# EAGLE board Dual Motor Driver (EAGLE 6.4)
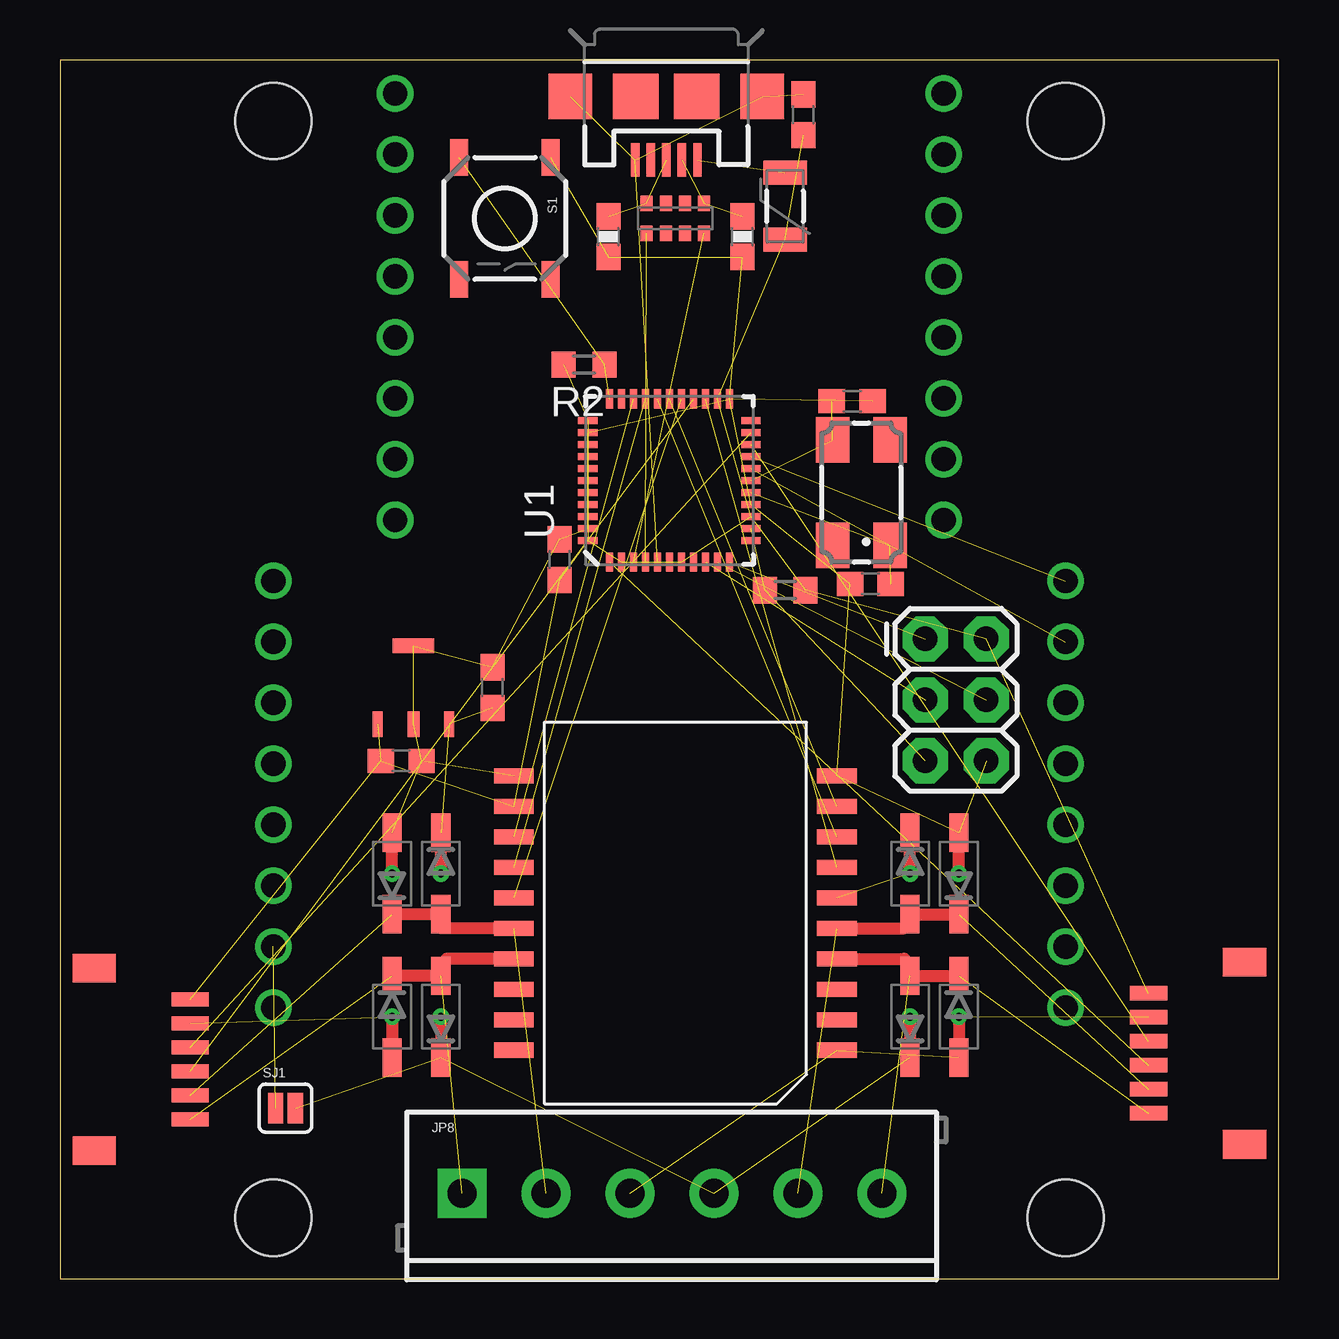
[diagram p0: board, top side]
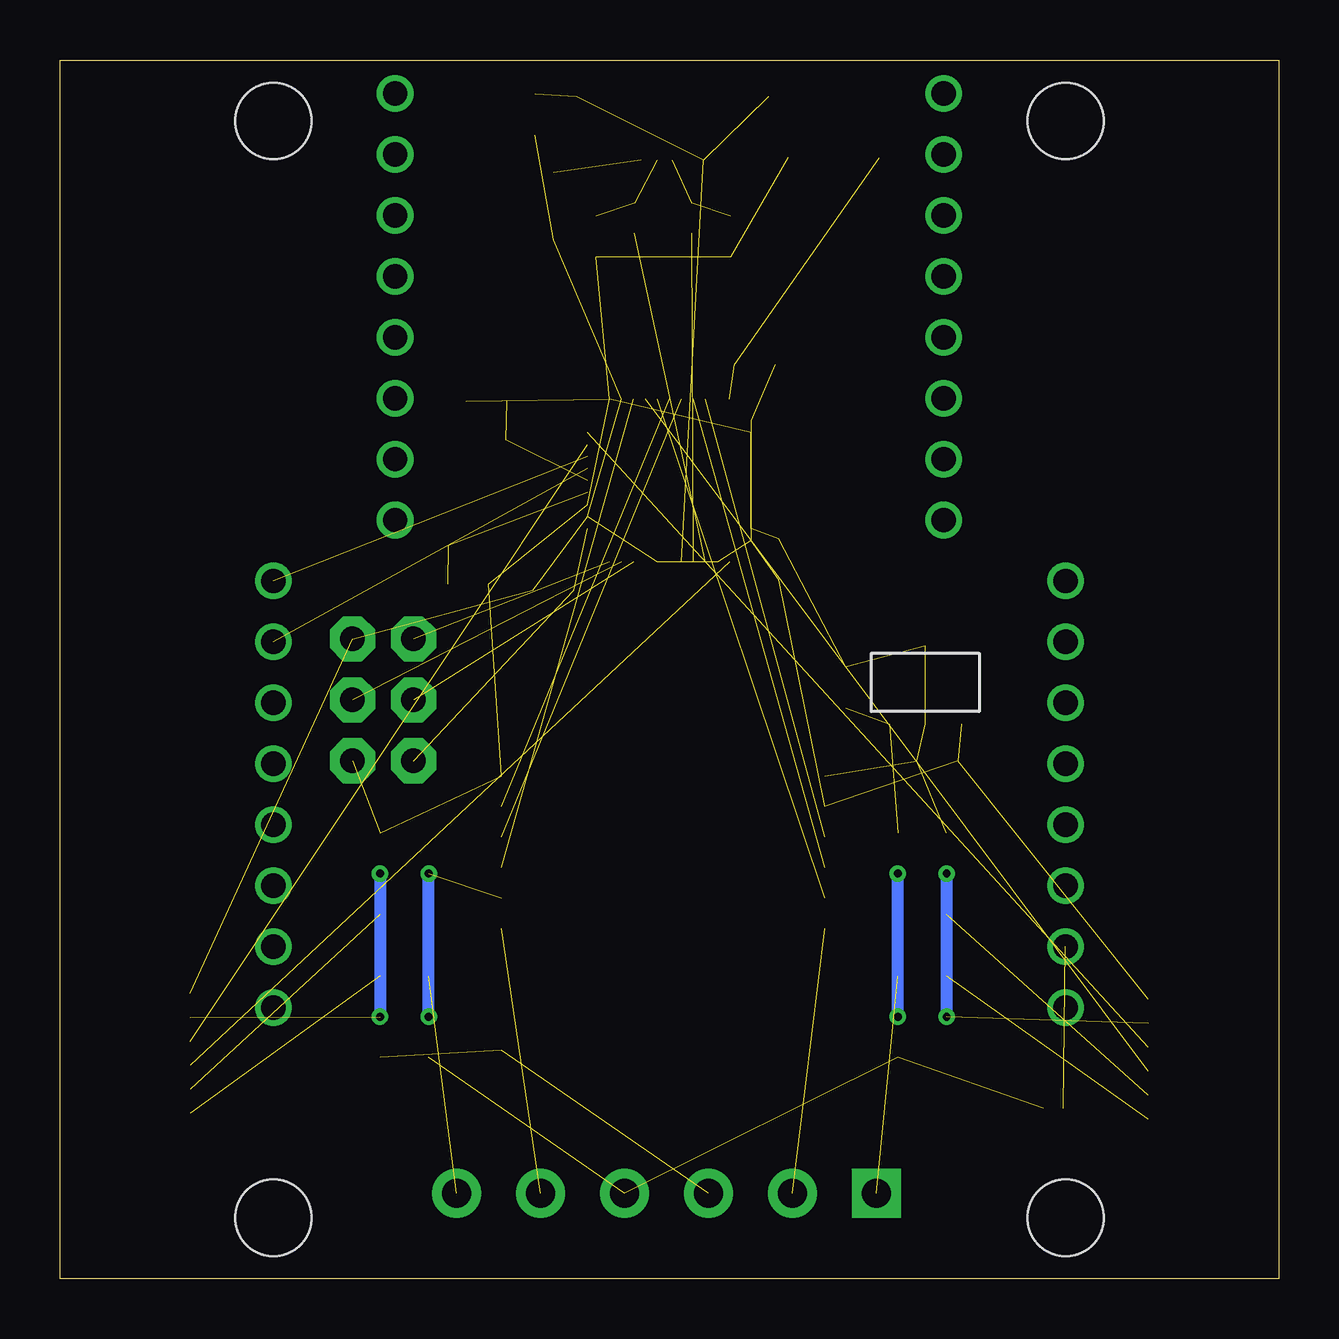
[diagram p1: board, bottom side, seen from below]

Size 50.8 x 50.8 mm. Coordinates in mm from the lower left corner, seen from the top.
Outline: 0,0 50.8,0 50.8,50.8 0,50.8 0,0
Copper layers (1*16): Top 0.0356mm / dielectric 1.5011mm / Bottom 0.0356mm
Design rules "OSHparkRules": minimum track width 6mil, minimum drill 13mil, track to track 6mil, track to pad 6mil, pad to pad 6mil, via to via 6mil, smd to smd 6mil, copper to edge 15mil, drill to drill 6mil, minimum pad ring 7mil, minimum via ring 7mil, stop-mask expansion 4mil, vias tented up to drill 0mil, thermal gap 10mil
Holes 3.17 mm at 8.89,2.54 41.91,2.54 41.91,48.26 8.89,48.26

## Footprints (pad centres in the part's own frame; a part is rotated, then mirrored left to right if it is on the bottom)
C0603 = smd 1.1 x 1: 1 -0.85,0; 2 0.85,0
SOD123 = smd 1.6 x 0.8: 1 -1.7,0; 2 1.7,0
PTC-1206 = smd 1 x 1.8: 1 -1.4,0; 2 1.4,0
2X3 = drill 1.016 pad 1.88 octagon: 1 0,0; 2 0,2.54; 3 2.54,0; 4 2.54,2.54; 5 5.08,0; 6 5.08,2.54
1X08_NO_SS = drill 1.016: 1 -8.89,0; 2 -6.35,0; 3 -3.81,0; 4 -1.27,0; 5 1.27,0; 6 3.81,0; 7 6.35,0; 8 8.89,0
6PIN-SH_SERIES_RA = smd 0.6 x 1.55: P$1 -2.5,2.125; P$2 -1.5,2.125; P$3 -0.5,2.125; P$4 0.5,2.125; P$5 1.5,2.125; P$6 2.5,2.125 | smd 1.2 x 1.8: P$7 3.8,-1.875; P$8 -3.8,-1.875
USB-MICROB = smd 0.35 x 1.4: D+ 0,2.65; D- -0.65,2.65; GND 1.3,2.65; ID 0.65,2.65; VBUS -1.3,2.65 | smd 1.8 x 1.9: MT1 -4,0; MT2 4,0 | smd 1.9 x 1.9: P$1 -1.27,0; P$2 1.27,0
SCREWTERMINAL-3.5MM-6 = drill 1.2 pad 2.032 square: 1 0,0 | drill 1.2 pad 2.032: 2 3.5,0; 3 7,0; 4 10.5,0; 5 14,0; 6 17.5,0
CTS406 = smd 1.9 x 1.4: 1 -2.2,-1.2; 2 2.2,-1.2; 3 2.2,1.2; 4 -2.2,1.2
R0603 = smd 1 x 1.1: 1 -0.85,0; 2 0.85,0
0603-ARV = smd 0.5 x 0.65: 1 -1.2,-0.625; 2 -0.4,-0.625; 3 0.4,-0.625; 4 1.2,-0.625; 5 1.2,0.625; 6 0.4,0.625; 7 -0.4,0.625; 8 -1.2,0.625
TACTILE_SWITCH_SMD = smd 1.524 x 0.762: 1 -2.54,1.905; 2 2.54,1.905; 3 -2.54,-1.905; 4 2.54,-1.905
SJ_2S = smd 0.635 x 1.27: 1 -0.412,0; 2 0.412,0
SPARKFUN-DIGITALIC_QFN-44-NOPAD = smd 0.8 x 0.3: 1 -3.4,2.5; 2 -3.4,2; 3 -3.4,1.5; 4 -3.4,1; 5 -3.4,0.5; 6 -3.4,0; 7 -3.4,-0.5; 8 -3.4,-1; 9 -3.4,-1.5; 10 -3.4,-2; 11 -3.4,-2.5; 23 3.4,-2.5; 24 3.4,-2; 25 3.4,-1.5; 26 3.4,-1; 27 3.4,-0.5; 28 3.4,0; 29 3.4,0.5; 30 3.4,1; 31 3.4,1.5; 32 3.4,2; 33 3.4,2.5 | smd 0.3 x 0.8: 12 -2.5,-3.4; 13 -2,-3.4; 14 -1.5,-3.4; 15 -1,-3.4; 16 -0.5,-3.4; 17 0,-3.4; 18 0.5,-3.4; 19 1,-3.4; 20 1.5,-3.4; 21 2,-3.4; 22 2.5,-3.4; 34 2.5,3.4; 35 2,3.4; 36 1.5,3.4; 37 1,3.4; 38 0.5,3.4; 39 0,3.4; 40 -0.5,3.4; 41 -1,3.4; 42 -1.5,3.4; 43 -2,3.4; 44 -2.5,3.4
POWERSO20 = smd 1.651 x 0.635: 1 -6.731,5.715; 2 -6.731,4.445; 3 -6.731,3.175; 4 -6.731,1.905; 5 -6.731,0.635; 6 -6.731,-0.635; 7 -6.731,-1.905; 8 -6.731,-3.175; 9 -6.731,-4.445; 10 -6.731,-5.715; 11 6.731,-5.715; 12 6.731,-4.445; 13 6.731,-3.175; 14 6.731,-1.905; 15 6.731,-0.635; 16 6.731,0.635; 17 6.731,1.905; 18 6.731,3.175; 19 6.731,4.445; 20 6.731,5.715
SOT89 = smd 0.42 x 1.045: P$1 -1.495,-1.525; P$3 1.495,-1.525 | smd 0.5 x 1.045: P$2 0,-1.525 | smd 1.725 x 0.605: P$4 0,1.745
0603-RES = smd 1.1 x 1: 1 -0.85,0; 2 0.85,0

## Placement (x,y rotation side)
C1  1uF  [C0603]  30.99,48.51 90 top
C2  22pF  [C0603]  33.78,28.96 0 top
C4  0.1uF  [C0603]  20.83,29.97 90 top
C6  0.1uF  [C0603]  14.22,21.59 0 top
C7  1uF  [C0603]  18.03,24.64 90 top
C8  22pF  [C0603]  33.02,36.58 180 top
D1  [SOD123]  37.47,10.92 270 top
D2  [SOD123]  37.47,16.89 90 top
D3  [SOD123]  13.84,16.89 90 top
D4  [SOD123]  13.84,10.92 270 top
D5  [SOD123]  15.88,10.92 90 top
D6  [SOD123]  15.88,16.89 270 top
D7  [SOD123]  35.43,16.89 270 top
D8  [SOD123]  35.43,10.92 90 top
F1  PTCSMD  [PTC-1206]  30.23,44.7 90 top
J1  AVR_SPI_PRG_6PTH  [2X3]  36.07,26.67 270 top
JP1  [1X08_NO_SS]  13.97,40.51 90 top
JP2  [1X08_NO_SS]  8.89,20.19 90 top
JP3  [1X08_NO_SS]  41.91,20.19 90 top
JP4  [1X08_NO_SS]  36.83,40.51 270 top
JP5  6PIN-SH_RIGHT_ANGLE  [6PIN-SH_SERIES_RA]  3.3,9.14 270 top
JP6  6PIN-SH_RIGHT_ANGLE  [6PIN-SH_SERIES_RA]  47.5,9.4 90 top
JP7  USB-MICROB  [USB-MICROB]  25.27,49.28 180 top
JP8  [SCREWTERMINAL-3.5MM-6]  16.76,3.56 0 top
Q1  16MHz  [CTS406]  33.4,32.77 90 top
R1  10K  [R0603]  30.23,28.7 0 top
R2  10K  [R0603]  21.84,38.1 180 top
RN1  [0603-ARV]  25.65,44.2 180 top
S1  SWITCH-MOMENTARY-2SMD  [TACTILE_SWITCH_SMD]  18.54,44.2 270 top
SJ1  SOLDERJUMPERNC  [SJ_2S]  9.4,7.11 0 top
U1  ATMEGA32U4QFN2  [SPARKFUN-DIGITALIC_QFN-44-NOPAD]  25.4,33.27 90 top
U2  L298_BRIDGE_DRIVER  [POWERSO20]  25.65,15.24 180 top
U5  VOLTAGE-REGULATOR  [SOT89]  14.73,24.64 0 top
Z1  [0603-RES]  22.86,43.43 90 top
Z2  [0603-RES]  28.45,43.43 90 top

## Library data of the parts
C1 C2 C4 C6-C8 R1 R2 = resistor
D1-D8 = semicon-smd-ipc; PART#: CDBW140-G
F1 = SparkFun-PowerIC; PART#: 0ZCJ0050FF2G
J1 JP8 = SparkFun-Connectors
JP1-JP4 = pinhead
JP5 JP6 = con-jst; PART#: SM06B-SRSS-TB(LF)(SN)
JP7 = SparkFun-Connectors; PROD_ID: CONN-09505
Q1 = crystal; OC_FARNELL: unknown; OC_NEWARK: unknown; PART#: 406C35D16M00000
RN1 = resistor-dil; OC_FARNELL: unknown; OC_NEWARK: unknown; PART#: YC164-JR-0722RL
S1 = SparkFun-Electromechanical
SJ1 = SparkFun-Passives
U1 = SparkFun-DigitalIC
U2 = SparkFun-PowerIC
U5 = My Parts; PART#: L78L05ACUTR
Z1 Z2 = SparkFun-DiscreteSemi; PART#: CG0603MLC-05E

## Nets
+5V: C1.1 C4.1 C6.1 F1.1 J1.2 JP5.P$1 JP6.P$6 R1.2 R2.2 U1.2 U1.6 U1.7 U1.14 U1.24 U1.34 U1.44 U2.12 U5.P$1
+24V: C7.1 D5.1 D6.1 D7.1 D8.1 JP8.4 SJ1.2 U2.6 U5.P$3
AI0: U1.36
AI1: U1.37
AI2: U1.38
AI3: U1.39
AI4: U1.40
AI5: U1.41
DIO11: U1.12
DIO13: U1.32
ENC1A: JP6.P$3 U1.1
ENC1B: JP6.P$4 U1.20
ENC2A: JP5.P$4 U1.26
ENC2B: JP5.P$3 U1.21
GND: C2.1 C4.2 C6.2 C7.2 C8.1 D1.2 D2.2 D3.2 D4.2 J1.6 JP5.P$2 JP6.P$5 JP8.3 S1.1 U1.15 U1.23 U1.35 U1.43 U2.1 U2.10 U2.11 U5.P$2 U5.P$4 Z1.1 Z2.1
M1+: U1.25 U2.7
M1-: U1.28 U2.9
M1A: D1.1 D8.2 JP6.P$1 JP8.6 U2.4
M1B: D2.1 D7.2 JP6.P$2 JP8.5 U2.5
M2+: U1.31 U2.13
M2-: U1.27 U2.15
M2A: D3.1 D6.2 JP5.P$5 JP8.2 U2.16
M2B: D4.1 D5.2 JP5.P$6 JP8.1 U2.17
MISO: J1.1 U1.11
MOSI: J1.4 U1.10
N$1: RN1.5 U1.4
N$2: RN1.8 U1.3
N$4: F1.2 JP7.VBUS
N$5: JP2.2 SJ1.1
N$6: C8.2 Q1.3 U1.17
N$7: C2.2 Q1.1 U1.16
PWM1: U1.29 U2.8
PWM2: U1.30 U2.14
RESET: J1.5 R1.1 U1.13
SCK: J1.3 U1.9
SCL: JP3.7 U1.18
SDA: JP3.8 U1.19
SS/RXLED: U1.8
TXLED: U1.22
UGND: C1.2 JP7.GND JP7.MT1 JP7.MT2 U1.5
USB_D+: JP7.D+ RN1.4 Z1.2
USB_D-: JP7.D- RN1.1 Z2.2
|HWB: R2.1 S1.3 U1.33

## Tracks (layer width: path | path; a pad name or v marks a point on that pad's centre or on a via)
+5V  (17 unrouted)
+24V  (via drill 0.33)  (6 unrouted)
  Top 0.508: v15.88,16.89 D6.1 | v15.88,10.92 D5.1 | v35.43,10.92 D8.1 | v35.43,16.89 D7.1
  Bottom 0.508: v15.88,10.92 v15.88,16.89 | v35.43,10.92 v35.43,16.89
ENC1A  (1 unrouted)
ENC1B  (1 unrouted)
ENC2A  (1 unrouted)
ENC2B  (1 unrouted)
GND  (via drill 0.33)  (22 unrouted)
  Top 0.508: v13.84,10.92 D4.2 | v13.84,16.89 D3.2 | v37.47,10.92 D1.2 | v37.47,16.89 D2.2
  Bottom 0.508: v13.84,16.89 v13.84,10.92 | v37.47,16.89 v37.47,10.92
M1+  (1 unrouted)
M1-  (1 unrouted)
M1A  (2 unrouted)
  Top 0.508: U2.4 35.18,13.34 35.31,13.21 35.31,12.75 D8.2 D1.1
M1B  (2 unrouted)
  Top 0.508: U2.5 35.18,14.61 35.31,14.73 35.31,15.06 D7.2 D2.1
M2+  (1 unrouted)
M2-  (1 unrouted)
M2A  (2 unrouted)
  Top 0.508: U2.16 15.88,14.61 15.75,14.73 15.75,15.06 D6.2 D3.1
M2B  (2 unrouted)
  Top 0.508: D4.1 D5.2 16,12.75 16,13.21 16.13,13.34 U2.17
MISO  (1 unrouted)
MOSI  (1 unrouted)
N$1  (1 unrouted)
N$2  (1 unrouted)
N$4  (1 unrouted)
N$5  (1 unrouted)
N$6  (2 unrouted)
N$7  (2 unrouted)
PWM1  (1 unrouted)
PWM2  (1 unrouted)
RESET  (2 unrouted)
SCK  (1 unrouted)
SCL  (1 unrouted)
SDA  (1 unrouted)
UGND  (4 unrouted)
USB_D+  (2 unrouted)
USB_D-  (2 unrouted)
|HWB  (2 unrouted)